# Altium PCB ADC_RS_MCU.PcbDoc
Units mm, origin at the board's own origin, x right, y up, seen from the top; angles counter-clockwise.
Board outline 165 x 40 mm, 4 copper layers (Top Layer, GND, 5V, Bottom Layer), stack 1.369 mm thick; 80 components, 57 nets, 318 pads, 74 vias.
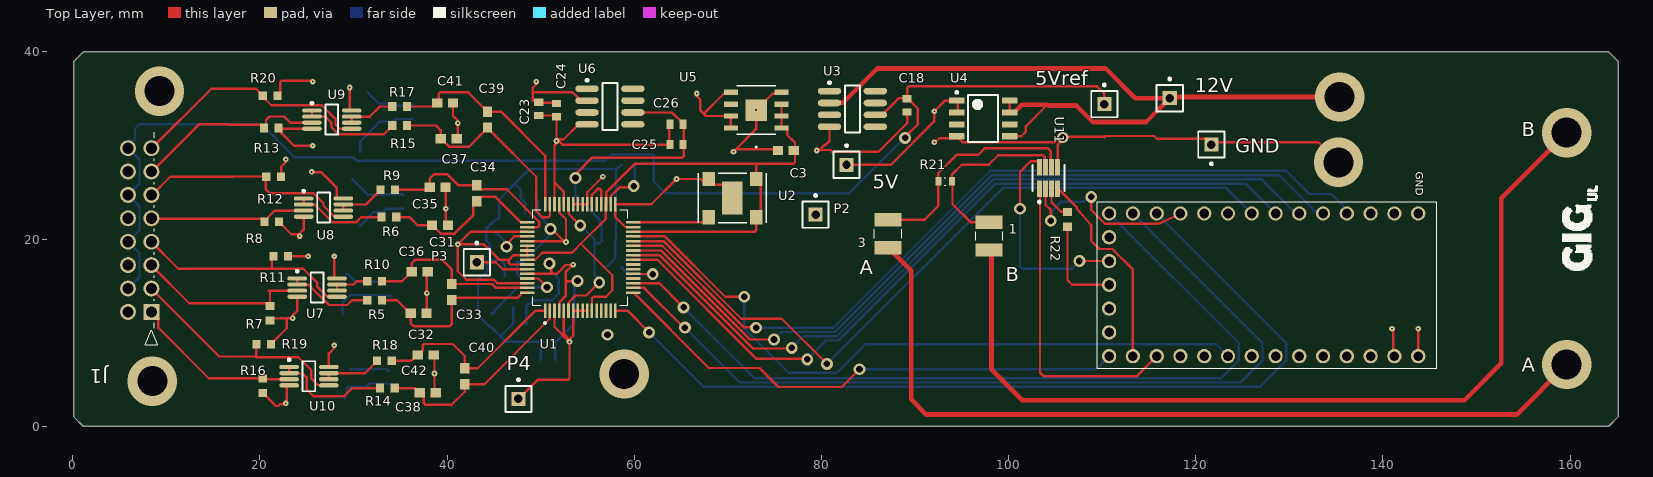
[diagram p0: Top Layer view]
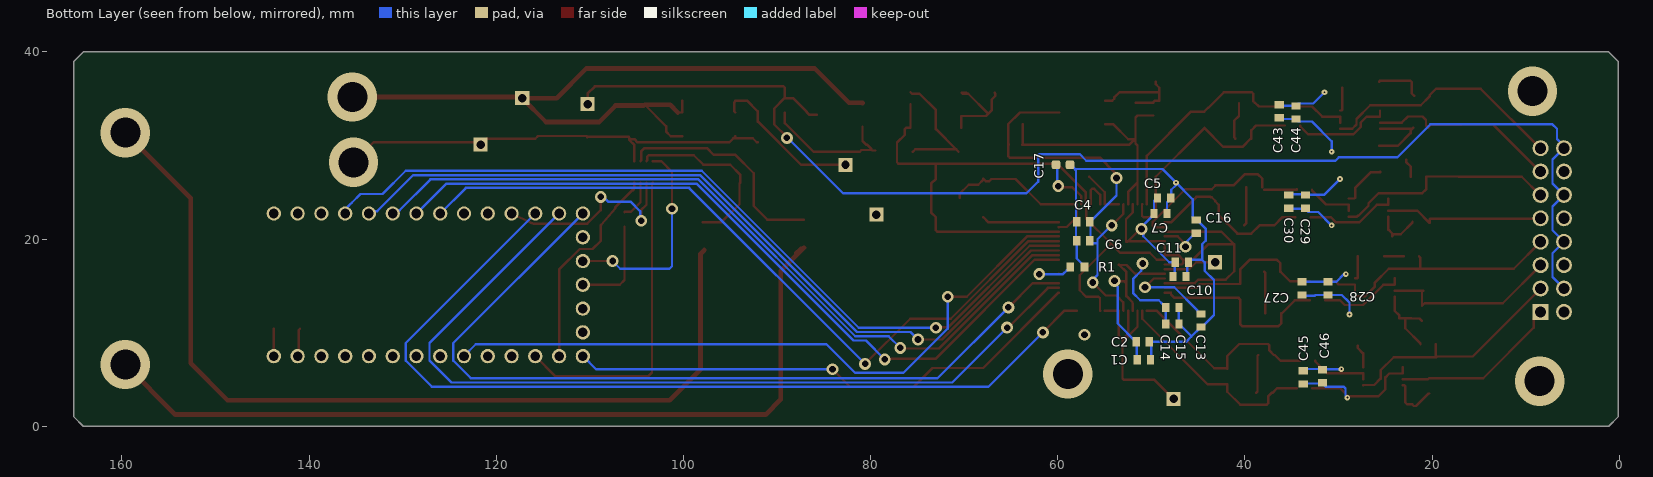
[diagram p1: Bottom Layer view, seen from below]
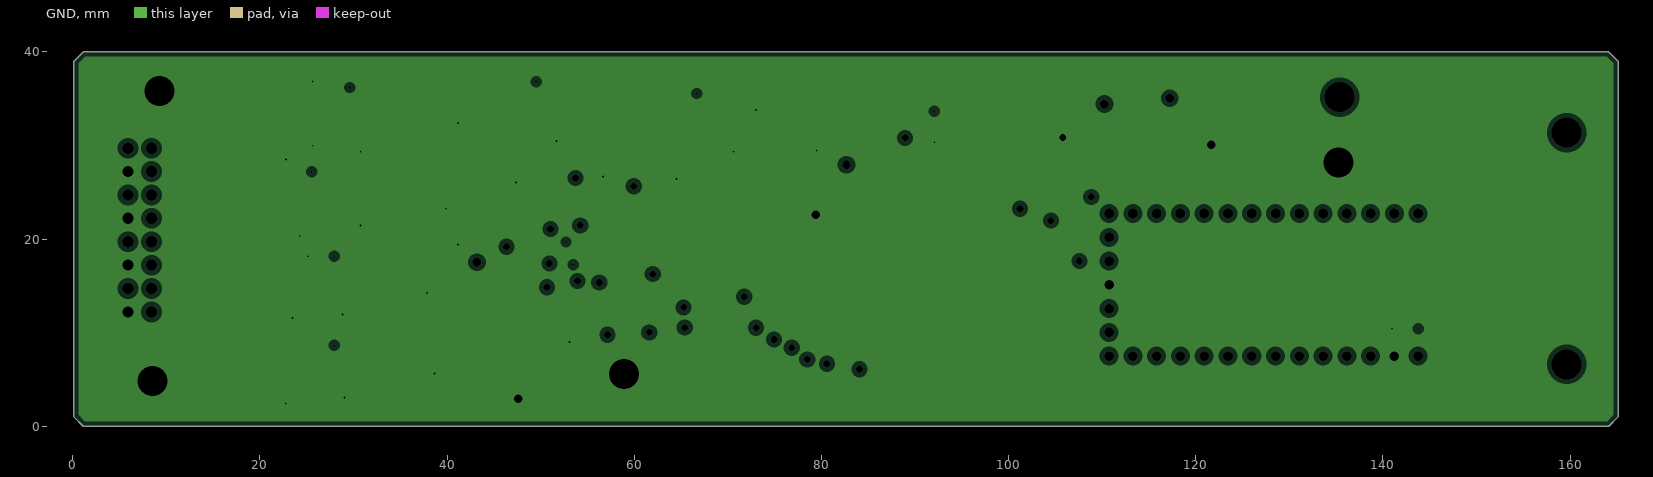
[diagram p2: GND, clearances drawn from the general rule]
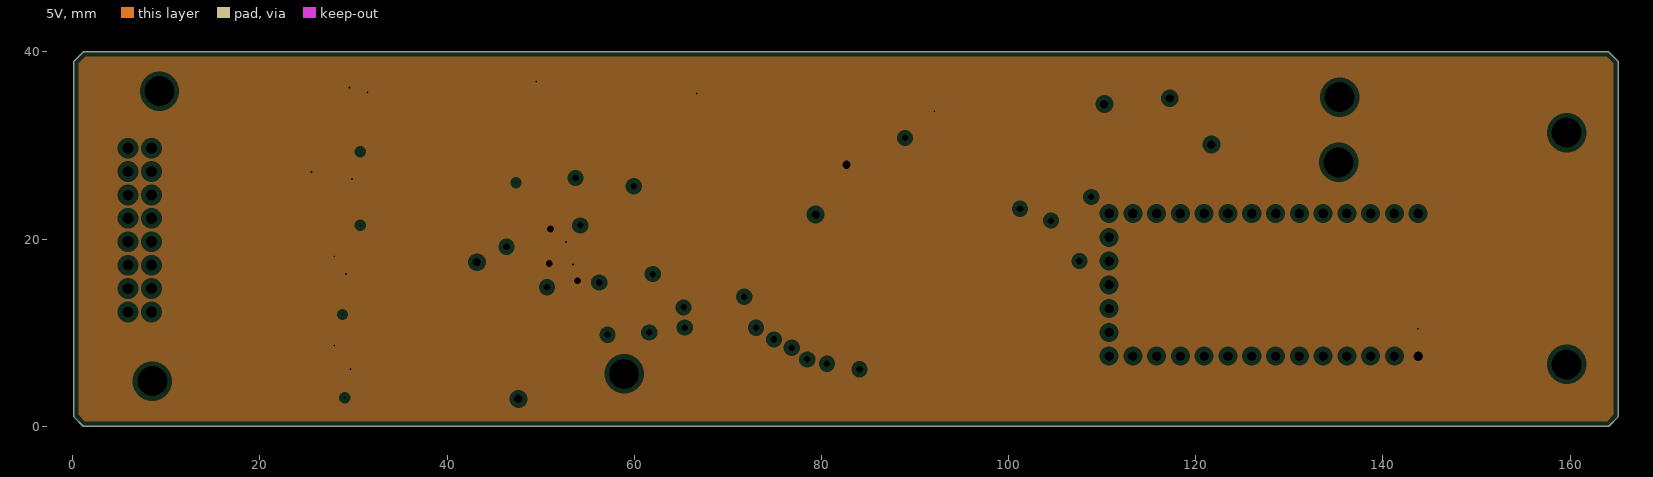
[diagram p3: 5V, clearances drawn from the general rule]
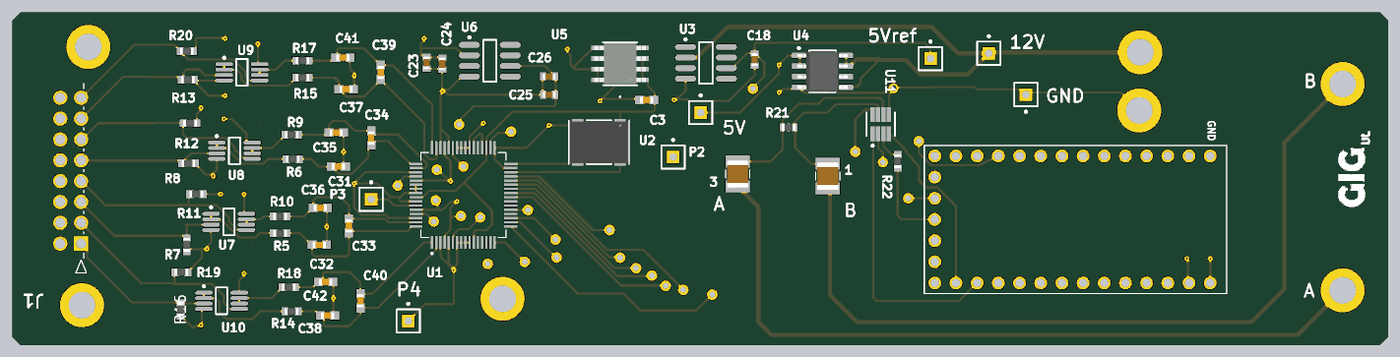
[diagram p4: 3D render of the assembled board from above, using the file's embedded part models]
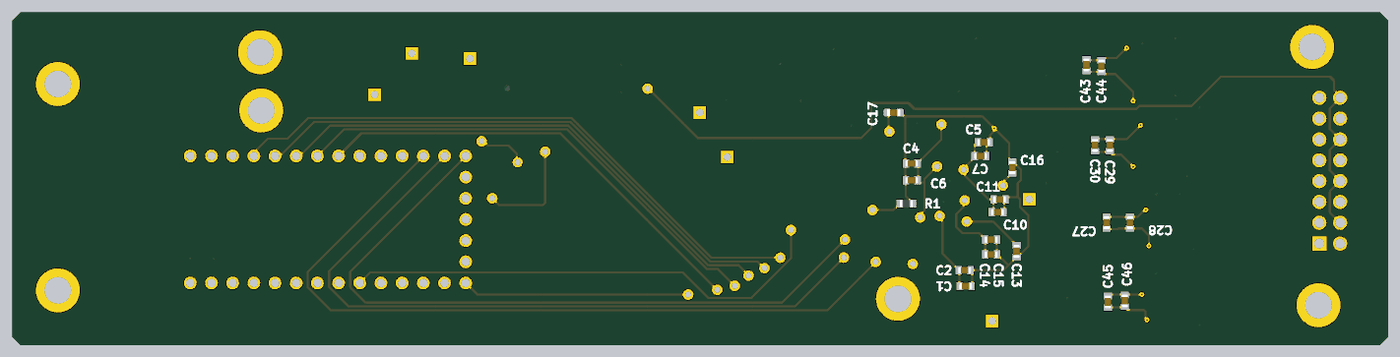
[diagram p5: 3D render of the assembled board from below, using the file's embedded part models]

## Layer stack, top to bottom
Top Solder: solder mask 0.0254, SM-001, Dk 4
Top Layer: signal copper 0.035
Dielectric 1: prepreg 0.1295, PP-017, Dk 4.3
Dielectric 2: prepreg 0.1295, PP-017, Dk 4.3
GND: plane copper 0.035, net GND
Dielectric 3: core 0.7112, Core-039, Dk 4.8
5V: plane copper 0.035, net 5V
Dielectric 4: prepreg 0.1295, PP-017, Dk 4.3
Dielectric 5: prepreg 0.1295, PP-017, Dk 4.3
Bottom Layer: signal copper 0.035
Bottom Solder: solder mask 0.0254, SM-001, Dk 4

## Board outline
0.127,1 0.127,39 1.127,40 164.127,40 165.127,39 165.127,1 164.127,0 1.127,0

## Design rules (kind name [scope] priority, off if disabled: settings)
BoardOutlineClearance [All] p1: gap=1 ignorepadtopadclearanceinfootprint=FALSE
Clearance [All] p1: gap=0.2 ignorepadtopadclearanceinfootprint=TRUE
HoleSize [All] p1: absolutevalues=TRUE maxlimit=5 minlimit=0.2 maxpercent=80.000 minpercent=20.000
HoleToHoleClearance [All] p1: gap=0.4 allowstackedmicrovias=TRUE
MinimumAnnularRing [All] p1: minimumring=0.15
MinimumSolderMaskSliver [All] p1: minsoldermaskwidth=0.1
PlaneClearance [All] p1: clearance=0.508
PlaneConnect [All] p1: planeconnectstyle=Relief reliefexpansion=0.508 reliefentries=4 reliefconductorwidth=0.254 reliefairgap=0.254
PolygonConnect [All] p1: connectstyle=Relief reliefconductorwidth=0.254 reliefentries=4 polygonreliefangle="90 Angle" airgapwidth=0.254
RoutingVias [All] p1: holewidth=0.711 width=1.27 viastyle="Through Hole" minholewidth=0.711 minwidth=1.27 maxholewidth=0.711 maxwidth=1.27
SilkToSolderMaskClearance [IsPad] p1: minsilkscreentomaskgap=0.2 clearancetoexposedcopper=TRUE
SolderMaskExpansion [All] p1: expansion=0.102 istentingtop=FALSE
Width [All] p1: maxlimit=1.254 minlimit=0.254 preferedwidth=0.254 bottomlayer_maxwidth=0.254 minimp=50.000000 maximp=50.000000 favimp=50.000000
24 further rules are at their usual default settings.

## Classes and differential pairs
component class Vref: C3 C18 C23 C24 C25 C26 U3 U4 U5 U6
component class thvd8000: 1 3 R21 R22 U11
component class driver0-3: C27 C28 C29 C30 C31 C32 C33 C34 C35 C36 C37 C38 C39 C40 C41 C42 C43 C44 C45 C46 J1 R5 R6 R7 R8 R9 R10 R11 R12 R13 R14 R15 R16 R17 R18 R19 R20 U7 U8 U9 U10
component class ad7768: 5V 5Vref C1 C2 C4 C5 C6 C7 C10 C11 C13 C14 C15 C16 C17 GND P2 P3 P4 R1 Teensy1 U2

## Components (designator, comment, footprint, x,y, rotation, side; value= is the part's Value field where it differs from the comment)
1 "0.47uF-250V" CAPC3326X280N 97.917,20.32 r270 top
3 "0.47uF-250V" CAPC3326X280N 87.122,20.574 r270 top
5V "Plug" PIN1 82.677,27.94 r0 top
5Vref "Plug" PIN1 110.236,34.417 r0 top
12V "Plug" PIN1 117.221,35.052 r0 top
C1 "1u" CAPC1608X90N 50.927,9.017 r0 bottom
C2 "0.1uF" CAPC1608X90N 50.8,7.112 r180 bottom
C3 "2.2uF" CAPC1608X90 76.2,29.464 r180 top
C4 "0.1uF" CAPC1608X90N 57.277,21.844 r0 bottom
C5 "0.1uF" CAPC1608X90N 48.641,24.384 r180 bottom
C6 "1u" CAPC1608X90N 57.277,19.812 r180 bottom
C7 "1u" CAPC1608X90N 49.022,22.733 r0 bottom
C10 "0.1uF" CAPC1608X90N 46.99,16.002 r180 bottom
C11 "1u" CAPC1608X90N 46.736,17.526 r0 bottom
C13 "1u" CAPC1608X90N 44.704,11.303 r90 bottom
C14 "0.1uF" CAPC1608X90N 47.752,10.922 r180 bottom
C15 "1u" CAPC1608X90N 47.752,12.7 r0 bottom
C16 "1u" CAPC1608X90N 45.212,21.336 r270 bottom
C17 "10uF" CAPC1608X9N 59.436,27.94 r0 bottom
C18 "0.1uF" CAPC1608X90N 89.154,34.29 r270 top
C23 "1u" CAPC1608X90N 49.81,33.909 r90 top
C24 "0.1uF" CAPC1608X90N 51.689,33.782 r270 top
C25 "1u" CAPC1608X90N 64.516,30.099 r0 top
C26 "0.1uF" CAPC1608X90N 64.516,32.258 r180 top
C27 "0.1uF" CAPC1608X90N 33.909,14.732 r270 bottom
C28 "1u" CAPC1608X90N 31.115,14.732 r270 bottom
C29 "0.1uF" CAPC1608X90N 33.528,24.003 r270 bottom
C30 "1u" CAPC1608X90N 35.306,24.003 r270 bottom
C31 "120pF" CAPC1608X90 39.243,21.463 r180 top
C32 "120pF" CAPC1608X90 36.957,12.065 r180 top
C33 "330pF" CAPC1608X90 40.513,14.351 r90 top
C34 "330pF" CAPC1608X90 43.18,24.892 r90 top
C35 "120pF" CAPC1608X90 38.989,25.527 r0 top
C36 "120pF" CAPC1608X90 37.084,16.51 r0 top
C37 "120pF" CAPC1608X90 40.171,30.734 r180 top
C38 "120pF" CAPC1608X90 37.946,3.57 r180 top
C39 "330pF" CAPC1608X90 44.323,32.766 r90 top
C40 "330pF" CAPC1608X90 41.883,5.348 r90 top
C41 "120pF" CAPC1608X90 39.79,34.544 r0 top
C42 "120pF" CAPC1608X90 37.719,7.62 r0 top
C43 "0.1uF" CAPC1608X90N 36.322,33.655 r270 bottom
C44 "1u" CAPC1608X90N 34.544,33.528 r270 bottom
C45 "1u" CAPC1608X90N 33.755,5.221 r270 bottom
C46 "0.1uF" CAPC1608X90N 31.723,5.348 r270 bottom
GND "Plug" PIN1 121.666,30.099 r180 top (schematic designator P7)
J1 "1053141216" CON_1053141216 8.41,12.218 r270 top
P2 "Plug" PIN1 79.375,22.606 r0 top
P3 "Plug" PIN1 43.18,17.526 r0 top
P4 "Plug" PIN1 47.625,2.921 r0 top
R1 "100" RESC1508X55N 57.912,17.018 r180 bottom
R5 "33" RESC1608X55N 32.258,13.462 r0 top
R6 "33" RESC1608X55N 33.782,22.352 r0 top
R7 "1M" RESC1608X55N 21.082,12.065 r90 top
R8 "1M" RESC1608X55N 21.278,21.844 r0 top
R9 "33" RESC1608X55N 33.655,25.273 r0 top
R10 "33" RESC1608X55N 32.258,15.494 r0 top
R11 "1M" RESC1608X55N 22.225,18.161 r180 top
R12 "1M" RESC1608X55N 21.463,26.67 r0 top
R13 "1M" RESC1608X55N 21.209,31.877 r180 top
R14 "33" RESC1608X55N 33.628,4.078 r0 top
R15 "33" RESC1608X55N 34.925,32.131 r0 top
R16 "1M" RESC1608X55N 20.32,4.318 r90 top
R17 "33" RESC1608X55N 34.925,34.163 r0 top
R18 "33" RESC1608X55N 33.305,6.999 r0 top
R19 "1M" RESC1608X55N 20.42,8.777 r180 top
R20 "1M" RESC1608X55N 21.082,35.306 r180 top
R21 "120" RES_ERA3AEB121V 93.218,26.162 r0 top
R22 "1.5k" RESC1608X55N 106.299,22.098 r90 top
Teensy1 "DEV-15583" MODULE_DEV-15583 127.254,15.113 r270 top
U1 "AD7768-4BSTZ" QFP50P1200X1200X160-64N 54.229,18.034 r90 top
U2 "DSC1001AI2-032.7680" DFN4_7X5_MCH 70.485,24.384 r270 top
U3 "ADR435BRZ" ADI-R-8_M 83.312,33.909 r0 top
U4 "REG103UA-5" D0008A_M 97.282,32.893 r0 top
U5 "ADP7118ARDZ-3.3-R7" SOIC_08_EP_3P9X4P9_ADI 73.025,33.782 r180 top
U6 "ADR4540BRZ" ADI-R-8_M 57.404,34.163 r0 top
U7 "ADA4841-2YRMZ-RL" ADI-RM-8_M 26.108,14.821 r0 top
U8 "ADA4841-2YRMZ-RL" ADI-RM-8_M 26.797,23.368 r0 top
U9 "ADA4841-2YRMZ-RL" ADI-RM-8_M 27.686,32.766 r0 top
U10 "ADA4841-2YRMZ-RL" ADI-RM-8_M 25.246,5.348 r0 top
U11 "THVD8000DDFR" DDF0008A-IPC_A 104.267,26.543 r90 top

## Footprints (in the part's own frame and the unit in brackets; to place one, negate y for a bottom-side part, rotate by r counter-clockwise, add the part's x,y. Pads: shape width x height; smd on the part's side, far side on the other; paste and mask are expansions set on the pad)
ADI-R-8_M [mm] "SOIC, 8-Leads, Body 4.9x3.9mm, Pitch 1.27mm, IPC Low Density"
  oval 2.5x0.7 smd: 1(-2.45,1.905) 2(-2.45,0.635) 3(-2.45,-0.635) 4(-2.45,-1.905) 5(2.45,-1.905) 6(2.45,-0.635) 7(2.45,0.635) 8(2.45,1.905)
  silkscreen extent -2.57,-2.5 0.8,2.93, body extent -2,-2.5 2,2.5, height 1.75
ADI-RM-8_M [mm] "SOP, 8-Leads, Body 3x3mm, Pitch 0.65mm, IPC Low Density"
  oval 2.1x0.45 smd: 1(-2.125,0.975) 2(-2.125,0.325) 3(-2.125,-0.325) 4(-2.125,-0.975) 5(2.125,-0.975) 6(2.125,-0.325) 7(2.125,0.325) 8(2.125,0.975)
  silkscreen extent -2.25,-1.6 0.67,1.87, body extent -1.6,-1.6 1.6,1.6, height 1.1
CAPC1608X9N [mm]
  rrect50% 0.93x0.93 smd: 1(-0.75,0) 2(0.75,0)
  body extent -0.8,-0.4 0.8,0.4, height 0.4
CAPC1608X90 [mm]
  rect 1.1x1 smd: 1(-0.85,0) 2(0.85,0)
  body extent -0.8,-0.41 0.8,0.41, height 0.45
CAPC1608X90N [mm]
  rect 0.78x0.99 smd: 1(-0.7,0) 2(0.7,0)
  body extent -0.8,-0.41 0.8,0.41, height 0.9
CAPC3326X280N [mm]
  rect 1.42x2.91 smd: 1(-1.492,0) 2(1.492,0)
  silkscreen extent -0.46,-1.45 0.46,1.45, body extent -1.65,-1.3 1.65,1.3, height 2.8
CON_1053141216 [mm]
  rect 1.7x1.7 hole 1.2 mask+0.076: 1(0,0)
  round 1.7 hole 1.2 mask+0.076: 2(-2.5,0) 3(-5,0) 4(-7.5,0) 5(-10,0) 6(-12.5,0) 7(-15,0) 8(-17.5,0) 9(0,-2.5) 10(-2.5,-2.5) 11(-5,-2.5) 12(-7.5,-2.5) 13(-10,-2.5) 14(-12.5,-2.5) 15(-15,-2.5) 16(-17.5,-2.5)
  silkscreen extent -19.22,-0.63 3.5,0.64, body extent 0,0 0.25,0.25, height 0.25
D0008A_M [mm] "SOIC, 8-Leads, Body 5x4mm, Pitch 1.27mm, IPC Low Density"
  rrect15% 1.65x0.65 smd: 1(-2.825,1.905) 2(-2.825,0.635) 3(-2.825,-0.635) 4(-2.825,-1.905) 5(2.825,-1.905) 6(2.825,-0.635) 7(2.825,0.635) 8(2.825,1.905)
  silkscreen extent -2.95,-2.5 1.6,2.9, body extent -3,-2.45 3,2.45, height 1.63
DDF0008A-IPC_A [mm]
  rect 1.757x0.512 smd paste+0 mask+0: 1(-1.151,0.975) 2(-1.151,0.325) 3(-1.151,-0.325) 4(-1.151,-0.975) 5(1.151,-0.975) 6(1.151,-0.325) 7(1.151,0.325) 8(1.151,0.975)
  silkscreen extent -2.7,-1.7 1.4,1.7, body extent 0,0 0.25,0.25, height 0.25
DFN4_7X5_MCH [mm]
  rect 1.505x1.349 smd paste+0 mask+0: 1(-2.052,2.54) 2(-2.052,-2.54) 3(2.052,-2.54) 4(2.052,2.54)
  rect 3.5x2.2 smd paste+0 mask+0: 5(0,0)
  silkscreen extent -5.52,-3.63 2.63,3.63, body extent -2.5,-3.5 2.5,3.5, height 0.85
MODULE_DEV-15583 [mm]
  round 1.53 hole 1.02: 0(-7.62,13.97) 1(-7.62,11.43) 2(-7.62,8.89) 3(-7.62,6.35) 3.3V_1(-2.54,-16.51) 3.3V_2(7.62,11.43) 4(-7.62,3.81) 5(-7.62,1.27) 6(-7.62,-1.27) 7(-7.62,-3.81) 8(-7.62,-6.35) 9(-7.62,-8.89) 10(-7.62,-11.43) 11(-7.62,-13.97) 12(-7.62,-16.51) 13(7.62,-16.51) 14(7.62,-13.97) 15(7.62,-11.43) 16(7.62,-8.89) 17(7.62,-6.35) 18(7.62,-3.81) 19(7.62,-1.27) 20(7.62,1.27) 21(7.62,3.81) 22(7.62,6.35) 23(7.62,8.89) G1(-7.62,16.51) G3(7.62,13.97) ON-OFF(5.08,-16.51) PGM(2.54,-16.51) VBAT(-5.08,-16.51) VIN(7.62,16.51) ""(0,-16.51)
  silkscreen extent -8.89,-17.78 8.89,18.48
PIN1 [mm]
  rect 1.5x1.5 hole 0.9: 1(0,0)
  silkscreen extent -1.4,-1.4 1.4,2.17
QFP50P1200X1200X160-64N [mm]
  rrect25% 1.56x0.28 smd mask+0.051: 1(-5.68,3.75) 2(-5.68,3.25) 3(-5.68,2.75) 4(-5.68,2.25) 5(-5.68,1.75) 6(-5.68,1.25) 7(-5.68,0.75) 8(-5.68,0.25) 9(-5.68,-0.25) 10(-5.68,-0.75) 11(-5.68,-1.25) 12(-5.68,-1.75) 13(-5.68,-2.25) 14(-5.68,-2.75) 15(-5.68,-3.25) 16(-5.68,-3.75) 33(5.68,-3.75) 34(5.68,-3.25) 35(5.68,-2.75) 36(5.68,-2.25) 37(5.68,-1.75) 38(5.68,-1.25) 39(5.68,-0.75) 40(5.68,-0.25) 41(5.68,0.25) 42(5.68,0.75) 43(5.68,1.25) 44(5.68,1.75) 45(5.68,2.25) 46(5.68,2.75) 47(5.68,3.25) 48(5.68,3.75)
  rrect25% 0.28x1.56 smd mask+0.051: 17(-3.75,-5.68) 18(-3.25,-5.68) 19(-2.75,-5.68) 20(-2.25,-5.68) 21(-1.75,-5.68) 22(-1.25,-5.68) 23(-0.75,-5.68) 24(-0.25,-5.68) 25(0.25,-5.68) 26(0.75,-5.68) 27(1.25,-5.68) 28(1.75,-5.68) 29(2.25,-5.68) 30(2.75,-5.68) 31(3.25,-5.68) 32(3.75,-5.68) 49(3.75,5.68) 50(3.25,5.68) 51(2.75,5.68) 52(2.25,5.68) 53(1.75,5.68) 54(1.25,5.68) 55(0.75,5.68) 56(0.25,5.68) 57(-0.25,5.68) 58(-0.75,5.68) 59(-1.25,5.68) 60(-1.75,5.68) 61(-2.25,5.68) 62(-2.75,5.68) 64(-3.75,5.68) ""(-3.25,5.68)
  silkscreen extent -7.11,-5.1 5.1,5.1
RES_ERA3AEB121V [mm]
  rect 0.65x0.9 smd: 1(-0.725,0) 2(0.725,0)
  silkscreen extent -0.08,-0.4 0.08,0.4, body extent -0.8,-0.4 0.8,0.4, height 0.45
RESC1508X55N [mm]
  rect 0.81x0.98 smd: 1(-0.771,0) 2(0.771,0)
  body extent -0.77,-0.43 0.77,0.43, height 0.55
RESC1608X55N [mm]
  rect 0.87x0.93 smd: 1(-0.78,0) 2(0.78,0)
  body extent -0.8,-0.4 0.8,0.4, height 0.55
SOIC_08_EP_3P9X4P9_ADI [mil]
  rect 59x22 smd paste+0 mask+0: 1(-106.5,75) 2(-106.5,25) 3(-106.5,-25) 4(-106.5,-75) 5(106.5,-75) 6(106.5,-25) 7(106.5,25) 8(106.5,75)
  rect 90x90 smd paste+0 mask+0: EPAD(0,0)
  silkscreen extent -82,-102 82,102, body extent -122,-96 122,96, height 69

## Part data
1 3: library part CMP-010-000002-1, Package=None, Availability=Unavailable, Component Type=Standard, Design Item ID=C1210X474KARACAUTO, MF="{'manufacturer': u'KEMET'}", MP=C1210X474KARACAUTO, Pin Count=2, Price=None, Source=workerBoard.SCHLIB
5V 5Vref GND P2 P3 P4: library part CMP-010-000007-1, Component Type=Standard, Design Item ID=Plug, LatestRevisionDate=17-Jul-2002, LatestRevisionNote="Re-released for DXP Platform.", Pin Count=1, Publisher="Altium Limited", Source=workerBoard.SCHLIB
C1 C6 C7 C11 C13 C15 C16 C23 C25 C28 C30 C44 C45: library part CMP-003-000003-1, "Capacitor", Manufacturer_Name=AVX, Manufacturer_Part_Number=0603YC105MAT4A, Component Type=Standard, Datasheet Link=https://componentsearchengine.com/Datasheets/1/06031A100FAT2A.pdf, Design Item ID=0603YC105MAT4A, Height=0.9mm, Pin Count=2, Source=workerBoard.SCHLIB
C2 C4 C5 C10 C14 C18 C24 C26 C27 C29 C43 C46: library part CMP-003-000001-1, "Cap Ceramic 0.1uF 25V X5R 10% SMD 0603 85ÂÂŽ T/R", Package=None, Availability=Unavailable, Component Type=Standard, Design Item ID=06033D104KAT2A, MF="{'manufacturer': u'AVX'}", MP=06033D104KAT2A, Pin Count=2, Price=None, Source=workerBoard.SCHLIB
C3: library part CMP-003-000006-1, "2.2UF 16V 20%", Package=None, Availability=Unavailable, Component Type=Standard, Design Item ID=F981C225MMA, MF="{'manufacturer': u'AVX'}", MP=F981C225MMA, Pin Count=2, Price=None, Source=workerBoard.SCHLIB
C17: library part CMP-003-000008-1, "CAP CER 10UF 10V X5R 0603", Package=None, Availability=Unavailable, Component Type=Standard, Design Item ID=GRT188R61A106ME13D, MF="{'manufacturer': u'Murata'}", MP=GRT188R61A106ME13D, Pin Count=2, Price=None, Source=workerBoard.SCHLIB
C31 C32 C35 C36 C37 C38 C41 C42: library part CMP-003-000002-1, "0603 120 pF 50 V Â±2 % Tolerance C0G/NP0 SMT Multilayer Ceramic Capacitor", Package=None, Availability=Unavailable, Component Type=Standard, Design Item ID=06035A121GAT2A, MF="{'manufacturer': u'AVX'}", MP=06035A121GAT2A, Pin Count=2, Price=None, Source=workerBoard.SCHLIB
C33 C34 C39 C40: library part CMP-003-000000-1, "0603 SMD Ceramic Capacitors 0603 330pF 25volts C0G 2%", Package=None, Availability=Unavailable, Component Type=Standard, Design Item ID=06033A331GAT2A, MF="{'manufacturer': u'AVX'}", MP=06033A331GAT2A, Pin Count=2, Price=None, Source=workerBoard.SCHLIB
J1: library part CMP-010-000000-1, "No Description Available", Mfr_Name="Molex Connector Corporation", Component Type=Standard, Copyright="Copyright (C) 2021 Ultra Librarian. All rights reserved.", Design Item ID=1053141216, Digi-Key_Part_Number_1=WM15165-ND, Manufacturer_Part_Number=1053141216, Pin Count=16, RefDes=RefDes, Source=workerBoard.SCHLIB, Type=DEV
R1: library part CMP-008-000002-1, Package=None, Availability=Unavailable, Component Type=Standard, Design Item ID=MCT0603MD1000DP500, MF="{'manufacturer': u'Vishay'}", MP=MCT0603MD1000DP500, Pin Count=2, Price=None, Source=workerBoard.SCHLIB
R5 R6 R9 R10 R14 R15 R17 R18: library part CMP-008-000006-1, "RES SMD 33 OHM 0.1% 1/10W 0603", Package=None, Availability=Unavailable, Component Type=Standard, Design Item ID=RT0603BRD0733RL_2, MF="{'manufacturer': u'Yageo'}", MP=RT0603BRD0733RL, Pin Count=2, Price=None, Source=workerBoard.SCHLIB
R7 R8 R11 R12 R13 R16 R19 R20: library part CMP-008-000007-1, Package=None, Availability=Unavailable, Component Type=Standard, Design Item ID=RT0603DRD071ML, MF="{'manufacturer': u'Yageo'}", MP=RT0603DRD071ML, Pin Count=2, Price=None, Source=workerBoard.SCHLIB
R21: library part CMP-008-000000-1, Package=None, Availability=Unavailable, Component Type=Standard, Design Item ID=ERA3AEB121V, MF="{'manufacturer': u'Panasonic'}", MP=ERA3AEB121V, Pin Count=2, Price=None, Source=workerBoard.SCHLIB
R22: library part CMP-008-000003-1, Package=None, Availability=Unavailable, Component Type=Standard, Design Item ID=RT0603BRD071K5L, MF="{'manufacturer': u'Yageo'}", MP=RT0603BRD071K5L, Pin Count=2, Price=None, Source=workerBoard.SCHLIB
Teensy1: library part CMP-010-000005-1, "RT1062 Teensy 4.0 i.MX ARMÂ® CortexÂ®-M7 MPU Embedded Evaluation Board", Package=None, Component Type=Standard, Design Item ID=DEV-15583, Digi-Key_Part_Number=1568-DEV-15583-ND, Digi-Key_Purchase_URL=https://www.digikey.com/product-detail/en/sparkfun-electronics/DEV-15583/1568-DEV-15583-ND/10384551?utm_source=snapeda&utm_medium=aggregator&utm_campaign=symbol, MF="SparkFun Electronics", MP=DEV-15583, Pin Count=33, SnapEDA_Link=https://www.snapeda.com/parts/DEV-15583/SparkFun%20Electronics/view-part/4001229/?ref=snap, Source=workerBoard.SCHLIB
U1: library part CMP-005-000000-1, "24 Bit Analog to Digital Converter 4 Input 4 Sigma-Delta 64-LQFP _10x10_", Package="LQFP -64 Analog Devices", Digi-Key_Part_Number=AD7768-4BSTZ-ND, Digi-Key_Purchase_URL=https://www.digikey.com/product-detail/en/analog-devices-inc/AD7768-4BSTZ/AD7768-4BSTZ-ND/6072260?utm_source=snapeda&utm_medium=aggregator&utm_campaign=symbol, MF="Analog Devices", MP=AD7768-4BSTZ, SnapEDA_Link=https://www.snapeda.com/parts/AD7768-4BSTZ/Analog%20Devices%20Inc./view-part/501603/?ref=snap
U2: library part CMP-010-000006-1, "No Description Available", Mfr_Name=Microchip, Component Type=Standard, Copyright="Copyright (C) 2021 Ultra Librarian. All rights reserved.", Design Item ID=DSC1001AI2-032.7680, Digi-Key_Part_Number_1=DSC1001AI2-032.7680-ND, Manufacturer_Part_Number=DSC1001AI2-032.7680, Pin Count=5, RefDes=RefDes, Source=workerBoard.SCHLIB, Type=DEV
U3: library part CMP-006-000001-1, "Ultralow Noise XFET Voltage Reference with Current Sink and Source Capability, 5 V Output, 7 to 18 V Supply, Industrial, 8-pin SOIC (R-8), Tube", Manufacturer="Analog Devices", Operating Temp Range="-40 to 125 degC", Code_JEDEC=MS-012-AA, Component Type=Standard, ComponentLink1Description="Manufacturer URL", ComponentLink1URL=http://www.analog.com/en/index.html, ComponentLink2Description=Datasheet, ComponentLink2URL=http://www.analog.com/static/imported-files/data_sheets/ADR430_431_433_434_435_439.pdf, ComponentLink3Description="Package Specification", ComponentLink3URL=http://www.analog.com/static/imported-files/packages/PKG_PDF/SOIC_Narrow%20(R)/R_8.pdf, ComponentLink4Description="URL Link1", ComponentLink4URL="Product URL:http://www.analog.com/en/special-linear-functions/voltage-references/adr435/products/product.html", DatasheetVersion="Rev. J", Design Item ID=CMP-0784-00226-1, Manufacturer Part Number=ADR435BRZ, Max V Supply (V)=18, Min V Supply (V)=7, Mounting Technology="Surface Mount", PackageDescription="8-Pin Standard Small Outline Package, Body 4.9 x 3.9 mm, Pitch 1.27 mm", PackageReference=R-8, PackageVersion="060506-A, 06/2006", Packing=Tube, PartNumber=ADR435BRZ, Pin Count=8, Ref Out TC (ppm/C)=1, Source=workerBoard.SCHLIB, Vout=5V
U4: library part CMP-010-000004-1, "Single Output Fast Transient Response LDO, 500 mA, Fixed 5 V Output, 2.1 to 15 V Input, 8-pin SOIC (D), -55 to 125 degC, Green (RoHS & no Sb/Br)", Manufacturer="Texas Instruments", Power Good=TRUE, Accuracy(%)=2, Code_JEDEC=MS-012, Component Type=Standard, ComponentLink1Description="Manufacturer URL", ComponentLink1URL=http://www.ti.com/, ComponentLink2Description=Datasheet, ComponentLink2URL=http://www.ti.com/general/docs/lit/getliterature.tsp?genericPartNumber=REG103-5&fileType=pdf, ComponentLink3Description="Package Specification", ComponentLink3URL=http://www.ti.com/litv/pdf/msoi002j, DatasheetVersion=SBVS010D, Design Item ID=CMP-0395-00135-2, Eco-Plan="Green (RoHS & no Sb/Br)", Fixed Output Options(V)=5, Iout(Max)(A)=0.5, Iq(Typ)(mA)=0.5, Manufacturer Part Number=REG103UA-5, Mounting Technology="Surface Mount", PackageDescription="8-Pin Plastic Small Outline, Body 4.9 x 3.9 mm, Pitch 1.27 mm", PackageReference=D0008A, PackageVersion=4040047-3/M, PartNumber=REG103UA-5, Pin Count=8, Source=workerBoard.SCHLIB, SubFamily="Single Channel LDO", Vdo(Typ)(mV)=160, Vin(Max)(V)=15, Vin(Min)(V)=2.1, Vout Adj(Max)(V)=5, Vout Adj(Min)(V)=5
U5: library part CMP-010-000001-1, "No Description Available", Mfr_Name="Analog Devices Inc", Component Type=Standard, Copyright="Copyright (C) 2021 Ultra Librarian. All rights reserved.", Design Item ID=ADP7118ARDZ-3.3-R7, Manufacturer_Part_Number=ADP7118ARDZ-3.3-R7, Pin Count=9, RefDes=RefDes, Source=workerBoard.SCHLIB, Type=DEV
U6: library part CMP-006-000000-1, "Ultralow Noise, High Accuracy Voltage Reference, 4.096 V Output, 3 to 15 V Supply, Industrial, 8-pin SOIC (R-8), Tube", Manufacturer="Analog Devices", Operating Temp Range="-40 to 125 degC", Code_JEDEC=MS-012-AA, Component Type=Standard, ComponentLink1Description="Manufacturer URL", ComponentLink1URL=http://www.analog.com/en/index.html, ComponentLink2Description=Datasheet, ComponentLink2URL=http://www.analog.com/static/imported-files/data_sheets/ADR4520_4525_4530_4533_4540_4550.pdf, ComponentLink3Description="Package Specification", ComponentLink3URL=http://www.analog.com/static/imported-files/packages/PKG_PDF/SOIC_Narrow%20(R)/R_8.pdf, ComponentLink4Description="URL Link1", ComponentLink4URL="Product URL:http://www.analog.com/en/special-linear-functions/voltage-references/adr4540/products/product.html", DatasheetVersion="Rev. 0", Design Item ID=CMP-0784-00192-1, Manufacturer Part Number=ADR4540BRZ, Max V Supply (V)=15, Min V Supply (V)=3, Mounting Technology="Surface Mount", PackageDescription="8-Pin Standard Small Outline Package, Body 4.9 x 3.9 mm, Pitch 1.27 mm", PackageReference=R-8, PackageVersion="060506-A, 06/2006", Packing=Tube, PartNumber=ADR4540BRZ, Pin Count=8, Ref Out TC (ppm/C)=2, Source=workerBoard.SCHLIB, Vout=4.096V
U7 U8 U9 U10: library part CMP-007-000000-1, "Double Channel Low Wide Band Noise Operational Amplifier, 80 MHz BW, 13 V/us SR, Industrial, 8-pin SOP (RM-8), Reel", Amplifiers Per Package=2, Generic Part Number=ADA4841-2, Input Bias Current=3uA, Input Offset Voltage=40uV, Manufacturer="Analog Devices", Code_JEDEC=MO-187-AA, Component Type=Standard, ComponentLink1Description="Manufacturer URL", ComponentLink1URL=http://www.analog.com/en/index.html, ComponentLink2Description=Datasheet, ComponentLink2URL=http://www.analog.com/static/imported-files/data_sheets/ADA4841-1_4841-2.pdf, ComponentLink3Description="Package Specification", ComponentLink3URL=http://www.analog.com/static/imported-files/packages/PKG_PDF/MSOP%28RM%29/RM_8.pdf, DatasheetVersion="Rev. E", Design Item ID=CMP-0384-01677-1, Iq/Amp=1.5mA, Manufacturer Part Number=ADA4841-2YRMZ-RL, Mounting Technology="Surface Mount", PackageDescription="8-Pin Mini Small Outline Package, Body 3 x 3 mm, Pitch 0.65 mm", PackageReference=RM-8, PartNumber=ADA4841-2YRMZ-RL, Pin Count=8, Slew Rate=13V/us, Small Signal Bandwidth=80MHz, Source=workerBoard.SCHLIB, V Span Max=12V, V Span Min=2.7V
U11: library part CMP-010-000008-1, "No Description Available", Mfr_Name="Texas Instruments", Component Type=Standard, Copyright="Copyright (C) 2021 Ultra Librarian. All rights reserved.", Design Item ID=THVD8000DDFR, Manufacturer_Part_Number=THVD8000DDFR, Pin Count=8, RefDes=RefDes, Source=workerBoard.SCHLIB, Type=DEV
12V: LatestRevisionDate=17-Jul-2002, LatestRevisionNote="Re-released for DXP Platform.", Publisher="Altium Limited"

## Via types
v1: diameter 1.27, hole 0.711, Top Layer to Bottom Layer, 25 vias
v2: diameter 0.6, hole 0.2, Top Layer to GND, 21 vias
v3: diameter 0.6, hole 0.2, Top Layer to 5V, 10 vias
v4: diameter 5.27, hole 3.2, Top Layer to Bottom Layer, 7 vias
v5: diameter 0.6, hole 0.2, GND to Bottom Layer, 5 vias
v6: diameter 0.6, hole 0.2, 5V to Bottom Layer, 4 vias
v7: diameter 1.21, hole 0.711, Top Layer to Bottom Layer, 1 vias
v8: diameter 1.21, hole 0.711, Top Layer to GND, 1 vias

## Nets (pads, with @x,y where several pads share a name; then routed paths per layer and width w, separated by ;. In a path a pad name is that pad's centre, name@x,y a point inside that pad or via, vN(x,y) a via of type N, cw(c..) or ccw(c..) an arc to the next point about the centre after c; other vN are vias at no path point)
3.3MCU: Teensy1.3.3V_1 U11.8 | length 22.6
  Top Layer w0.254: v1(101.219,23.241) 101.219,27.178 102.37,28.329 U11.8@103.292,28.329 ; v1(107.569,17.653) Teensy1.3.3V_1
  Bottom Layer w0.254: v1(101.219,23.241) 101.219,17.102 101.495,16.826 106.742,16.826 v1(107.569,17.653)
5V: 5V.1 C1.2 C2.1 C5.1 C7.2 C10.1 C11.2 C14.1 C15.2 C23.2 C24.1 C27.1 C28.1 C29.1 C30.1 C43.1 C44.1 C45.1 C46.1 Teensy1.VIN U1.4 U1.45 U1.53 U1.60 U4.1 U4.2 U5.5 U5.7 U5.8 U6.2 U7.8 U8.8 U9.8 U10.8 | length 129.6
  Top Layer w0.254: v3(25.527,27.178) 25.548,27.157 26.543,27.157 28.224,25.476 28.224,24.434 28.315,24.343 U8.8 ; U10.8 27.371,7.792 27.94,8.361 v3(27.94,8.636) ; v3(27.94,18.161) 27.94,15.886 28.031,15.796 U7.8 ; v3(29.591,36.195) 29.591,33.832 29.682,33.741 U9.8 ; U1.60 51.308,16.284 ; U1.53 52.512,19.784 52.611,19.685 v3(52.705,19.685) ; v3(49.53,36.83) 49.53,36.555 49.149,36.174 49.149,35.687 ; C23.2@49.81,34.557 C24.1@51.689,34.557 ; C23.2 49.621,34.798 49.149,34.798 49.149,35.687 ; v1(50.927,17.399) 51.121,17.205 51.121,16.471 51.308,16.284 ; v1(51.054,21.082) 51.181,21.082 52.512,19.751 52.573,19.751 v3@52.606,19.784 ; U1.4 51.992,12.367 51.992,13.087 52.012,13.107 52.012,13.249 52.667,13.904 52.667,15.24 ; U1.45 51.992,23.701 51.992,22.839 52.705,22.126 v3@52.705,19.784 ; v3(53.467,17.272) v3@53.423,17.228 ; v1(53.93,15.539) 53.877,15.486 52.914,15.486 52.667,15.24 ; U6.2 54.175,34.798 53.969,35.004 53.969,35.138 53.77,35.337 53.751,35.337 53.401,35.687 49.149,35.687 ; v3@66.739,35.623 v3(66.675,35.56) 66.675,35.285 67.064,34.896 67.064,33.735 67.437,33.362 ; U5.5@69.787,35.623 70.256,35.623 70.168,35.535 69.56,35.535 67.437,33.412 67.437,33.362 ; U5.8 U5.7 67.652,33.147 67.437,33.362 ; 5V.1 87.43,27.94 92.038,32.549 92.038,33.618 v3(92.075,33.655) 93.218,34.798 U4.1 94.457,34.727 94.584,34.6 94.584,33.655 U4.2 ; Teensy1.VIN v3(143.764,10.414) ; 51.308,16.284 51.717,16.284 52.661,17.228 v3@53.423,17.228 ; 52.667,15.24 52.667,16.472 v3@53.423,17.228
  Bottom Layer w0.254: v6(29.21,16.256) 29.415,16.256 30.239,15.432 C28.1 33.834,15.432 C27.1@33.909,15.507 ; v6(29.691,6.11) 31.71,6.11 31.723,6.123 33.553,6.123 C45.1 ; v6(29.845,26.416) 31.503,24.758 33.508,24.758 33.528,24.778 35.231,24.778 C30.1 ; v6(31.496,35.687) 32.692,34.491 34.281,34.491 C44.1 36.12,34.228 C43.1@36.322,34.43 ; C11.2 C11.2@47.498,17.526 ; C10.1@47.765,16.002 47.498,16.269 C11.2@47.498,17.526 ; C14.1@48.527,10.922 48.452,10.997 C15.2 48.452,12.805 48.715,13.068 48.82,13.068 49.214,13.462 51.181,13.462 51.943,14.224 51.943,15.748 51.074,16.617 51.074,17.252 v1(50.927,17.399) ; C5.1@49.416,24.384 49.722,24.078 C7.2 49.722,22.628 51.054,21.296 v1(51.054,21.082) 50.86,20.888 50.86,20.306 48.08,17.526 C11.2@47.498,17.526 ; C2.1@51.575,7.112 51.575,8.965 C1.2 53.594,10.984 53.594,14.929 53.93,15.264 v1(53.93,15.539)
"5V ref": 5Vref.1 C18.1 J1.10 J1.12 J1.14 J1.16 U3.6 | length 143.8
  Top Layer w0.254: U3.6 86.541,33.274 86.837,33.57 86.837,33.624 88.278,35.065 C18.1@89.154,35.065 ; v1(88.945,30.816) 88.945,30.906 90.297,32.258 90.297,33.952 89.184,35.065 C18.1@89.154,35.065 ; 5Vref.1 110.236,35.548 109.462,36.322 89.303,36.322 89.154,36.173 C18.1@89.154,35.065
  Bottom Layer w0.254: J1.10 7.141,15.949 7.141,18.487 J1.12 7.141,20.949 7.141,23.487 J1.14 7.141,25.949 7.141,28.487 J1.16 5.91,29.958 6.66,30.709 6.66,31.784 7.134,32.258 20.193,32.258 23.719,28.732 29.979,28.732 30.336,28.375 56.95,28.375 57.658,29.083 61.954,29.083 62.103,28.934 62.103,26.127 63.338,24.892 82.931,24.892 88.855,30.816 v1(88.945,30.816)
12V: 12V.1 U3.2 U4.5 U4.7 U4.8 | length 83.7
  Top Layer w0.254: U4.5 101.346,30.988 101.854,31.496 101.854,32.062 104.14,34.348 104.223,34.265 ; U4.8 100.107,34.219 U4.7 U4.7@100.607,33.528 ; 12V.1 12V.1@117.348,35.179
  Top Layer w0.5: U3.2 80.873,34.555 82.307,34.555 85.979,38.227 110.363,38.227 113.538,35.052 12V.1 114.681,32.512 109.012,32.512 107.259,34.265 104.223,34.265 ; U4.7@100.607,33.528 101.427,34.348 104.14,34.348 ; 12V.1@117.348,35.179 v4(135.382,35.179)
A: 3.2 | length 91.4
  Top Layer w0.254: 3.2 87.481,19.082 3.2@88.064,18.499
  Top Layer w0.5: 3.2 89.588,16.616 89.588,2.868 91.206,1.25 154.285,1.25 v4(159.639,6.604)
AIN0+: C32.2 C33.1 R5.2 U1.64 | length 20.4
  Top Layer w0.254: R5.2@33.078,13.462 34.66,13.462 36.057,12.065 C32.2 36.107,11.01 36.449,10.668 40.259,10.668 40.513,10.922 40.513,13.551 40.678,13.716 47.539,13.716 47.896,14.073 47.896,14.271 47.909,14.284 U1.64
AIN0-: C33.2 C36.1 R10.2 U1. | length 19.1
  Top Layer w0.254: R10.2@33.078,15.494 35.168,15.494 36.184,16.51 C36.1 36.234,17.438 36.576,17.78 39.497,17.78 40.513,16.764 C33.2 44.818,15.201 45.235,14.784 U1.
AIN1+: C38.2 C40.1 R14.2 U1.2 | length 22.8
  Top Layer w0.254: R14.2@34.448,4.078 36.538,4.078 37.046,3.57 C38.2 37.146,3.57 37.519,3.197 37.519,2.448 37.668,2.3 40.486,2.3 41.883,3.697 C40.1 43.985,4.498 50.966,11.479 50.966,12.341 U1.2
AIN1-: C40.2 C42.1 R18.2 U1.1 | length 21.9
  Top Layer w0.254: R18.2@34.125,6.999 36.198,6.999 36.819,7.62 36.919,7.62 37.392,8.093 37.392,8.636 37.541,8.785 40.605,8.785 41.883,7.507 C40.2@41.883,6.148 ; C40.2 43.283,6.198 49.439,12.354 U1.1
AIN2+: C31.2 C34.1 R6.2 U1.49 | length 18
  Top Layer w0.254: R6.2@34.602,22.352 35.975,22.352 36.864,21.463 C31.2 ; C31.2@38.443,21.463 39.324,20.582 40.801,20.582 42.807,22.588 42.807,23.669 C34.1 43.18,24.092 43.553,24.465 43.656,24.465 43.702,24.511 45.182,24.511 47.909,21.784 U1.49
AIN2-: C34.2 C35.1 R9.2 U1.50 | length 20.3
  Top Layer w0.254: R9.2@34.475,25.343 34.475,25.273 C35.1@37.935,25.273 ; C35.1 38.139,26.455 38.6,26.916 40.039,26.916 41.213,25.742 C34.2 43.18,25.692 43.553,25.319 46.376,25.319 49.859,21.836 49.859,21.433 49.71,21.284 U1.50
AIN3+: C37.2 C39.1 R15.2 U1.47 | length 25
  Top Layer w0.254: R15.2@35.745,32.131 38.805,32.131 39.321,31.615 C37.2 39.371,30.734 40.252,29.853 42.31,29.853 C39.1@44.323,31.866 ; C39.1 C39.1@44.323,31.866 ; U1.47 50.992,23.701 50.992,22.479 50.843,22.33 50.187,22.33 49.53,22.987 49.53,26.659 44.696,31.493 C39.1@44.323,31.866
AIN3-: C39.2 C41.1 R17.2 U1.48 | length 23.9
  Top Layer w0.254: R17.2@35.745,34.163 38.509,34.163 38.89,34.544 C41.1 39.116,34.72 39.116,35.538 39.265,35.687 42.252,35.687 43.9,34.039 43.95,34.039 44.323,33.666 C39.2 45.759,33.616 50.479,28.896 U1.48
B: 1.2 | length 97.9
  Top Layer w0.5: 1.2@97.79,18.828 98.171,18.447 98.171,6.096 101.473,2.794 148.717,2.794 152.654,6.731 152.654,24.384 v4(159.639,31.369)
CS: Teensy1.10 U1.16 | length 97.7
  Top Layer w0.254: U1.16 59.274,12.354 v1(61.595,10.033)
  Bottom Layer w0.254: v1(61.595,10.033) 67.402,4.226 126.878,4.226 129.67,7.018 129.67,8.887 Teensy1.10
DCLK: Teensy1.6 U1.28 | length 80.4
  Top Layer w0.254: U1.28 63.14,19.784 71.433,11.491 75.765,11.491 v1(80.585,6.671)
  Bottom Layer w0.254: v1(80.585,6.671) 99.387,25.473 123.244,25.473 Teensy1.6
DOUT0: Teensy1.2 U1.27 | length 88.9
  Top Layer w0.254: U1.27 62.998,19.284 71.687,10.595 72.959,10.595 v1(73.025,10.529)
  Bottom Layer w0.254: v1(73.025,10.529) 81.268,10.529 98.044,27.305 129.667,27.305 132.152,24.82 132.575,24.82 134.488,24.82 135.431,23.877 cw(c134.339,22.402) Teensy1.2
DOUT1: Teensy1.3 U1.26 | length 86.6
  Top Layer w0.254: U1.26 62.856,18.784 72.369,9.271 v1(74.93,9.271)
  Bottom Layer w0.254: v1(74.93,9.271) 75.734,10.075 81.456,10.075 98.216,26.835 128.867,26.835 132.73,22.972 133.365,22.972 Teensy1.3
DOUT2: Teensy1.4 U1.25 | length 84.3
  Top Layer w0.254: U1.25 62.714,18.284 72.689,8.309 76.762,8.309 v1(76.835,8.382)
  Bottom Layer w0.254: v1(76.835,8.382) 78.074,9.621 81.644,9.621 98.404,26.381 127.035,26.381 130.317,23.099 130.353,23.099 130.719,22.733 Teensy1.4
DOUT3: Teensy1.5 U1.24 | length 82.1
  Top Layer w0.254: U1.24 62.48,17.784 73.07,7.194 78.441,7.194 v1(78.486,7.149)
  Bottom Layer w0.254: v1(78.486,7.149) 80.505,9.167 81.833,9.167 98.592,25.927 125.33,25.927 Teensy1.5
DRDY: Teensy1.18 U1.29 | length 73.4
  Top Layer w0.254: U1.29 63.282,20.284 69.723,13.843 v1(71.755,13.843)
  Bottom Layer w0.254: v1(71.755,13.843) 71.755,10.439 76.485,5.709 81.655,5.709 84.709,8.763 110.594,8.763 110.602,8.755 110.706,8.755 122.182,8.755 Teensy1.18
GND: C1.1 C2.2 C3.2 C4.2 C5.2 C6.1 C7.1 C10.2 C11.1 C13.1 C14.2 C15.1 C16.1 C17.1 C18.2 C23.1 C24.2 C25.1 C26.2 C27.2 C28.2 C29.2 C30.2 C31.1 C32.1 C35.2 C36.2 C37.1 C38.1 C41.2 C42.2 C43.2 C44.2 C45.2 C46.2 GND.1 J1.9 J1.11 J1.13 J1.15 P2.1 P4.1 R1.2 R7.1 R8.2 R11.1 R12.2 R13.1 R16.1 R19.1 R20.1 R22.1 Teensy1. Teensy1.G3 U1.3 U1.5 U1.7 U1.8 U1.9 U1.10 U1.31 U1.33 U1.39 U1.40 U1.41 U1.42 U1.44 U1.46 U1.51 U1.54 U1.55 U1.56 U1.58 U1.62 U2.2 U2.5 U3.4 U4.4 U5.4 U5.EPAD U6.4 U7.4 U8.4 U9.4 U10.4 U11.5 | length 339
  Top Layer w0.254: R16.1@20.32,3.498 20.39,3.498 21.717,2.171 21.962,2.171 22.137,2.346 22.666,2.346 22.86,2.54 22.86,4.282 22.951,4.373 U10.4 ; R7.1@21.082,11.245 21.35,11.513 22.201,11.513 22.245,11.557 22.86,11.557 ; R19.1@21.24,8.777 21.24,8.847 22.86,10.467 22.86,11.557 ; R20.1@21.902,35.306 22.17,35.574 22.17,36.753 22.319,36.902 25.582,36.902 v2(25.654,36.83) ; R13.1@22.029,31.877 22.297,31.609 22.297,31.327 23.652,29.972 v2(25.654,29.972) ; R8.2@22.098,21.844 22.098,21.774 23.358,20.514 24.063,20.514 v2(24.257,20.32) 24.257,20.595 24.672,21.01 U8.4 ; R13.1@22.115,31.791 U9.4 ; R12.2@22.283,26.67 22.283,27.739 22.78,28.236 v2(22.78,28.511) ; R11.1@23.045,18.161 v2(25.146,18.161) ; U7.4 23.983,12.32 23.495,11.832 v2(23.495,11.557) 22.86,11.557 ; C32.1 37.846,12.104 v2(37.846,14.224) 37.846,16.422 C36.2 ; C42.2 38.66,7.529 v2(38.66,5.633) 38.66,3.706 C38.1 ; C35.2 39.878,25.488 v2(39.878,23.241) 39.878,21.678 C31.1 ; C41.2 40.64,33.168 41.148,32.66 v2(41.148,32.385) 41.148,30.861 C37.1 ; P4.1 49.657,4.953 52.937,4.953 53.086,5.102 v2(53.086,9.017) ; U1.54@48.536,19.271 U1.54 U1.55 U1.56 47.113,18.284 46.609,17.78 ; U1.62 48.536,15.297 45.364,15.297 45.006,15.655 42.059,15.655 41.148,16.566 v2(41.148,19.431) ; U1.58 46.758,17.284 46.609,17.433 46.609,17.78 ; U1.51 42.501,20.784 v2(41.148,19.431) ; C23.1 51.487,33.209 51.689,33.007 v2(51.689,30.48) ; U1.3 51.479,10.624 v2(53.086,9.017) ; U1.46 51.479,26.035 ; U1.5 52.479,9.847 v2@53.086,9.24 ; U1.44@52.492,23.727 U1.44 52.479,25.035 51.479,26.035 ; U1.42 U1.41 U1.40 U1.39 54.979,25.007 v2(56.642,26.67) ; U6.4 54.054,32.258 52.47,30.674 51.883,30.674 v2(51.689,30.48) ; U1.10 U1.9 U1.8 U1.7 53.479,9.685 53.086,9.292 v2@53.086,9.24 ; U1.31 59.896,21.297 59.034,21.297 57.979,22.352 U1.33 61.814,23.714 v2(64.516,26.416) 67.076,26.416 67.32,26.173 67.681,26.173 U2.2 67.945,26.359 68.493,25.811 69.512,25.811 70.485,24.838 U2.5 ; C26.2@63.741,32.258 C25.1@63.741,30.099 ; C25.1 C25.1@63.741,30.099 ; v2(70.612,29.337) 70.866,29.591 ; C3.2@75.477,29.337 75.223,29.591 70.866,29.591 ; U5.4 75.578,35.535 74.778,35.535 v2(73.025,33.782) 73.025,31.75 70.866,29.591 ; P2.1 P2.1@79.893,22.088 ; v2(79.502,29.464) 79.844,29.464 ; U3.4 80.862,30.482 80.45,30.07 80.332,30.07 79.903,29.641 79.903,29.524 80.966,29.524 81.153,29.337 86.106,29.337 89.154,32.385 C18.2@89.154,33.515 ; v2(92.075,30.353) 92.169,30.353 92.598,30.782 U4.4@94.663,30.782 ; U4.4 U4.4@94.663,30.782 ; U11.5@105.242,28.329 105.242,30.053 v8@105.791,30.602 ; R22.1 106.299,15.621 106.807,15.113 Teensy1. ; 110.294,30.872 110.236,30.93 ; v4(135.255,28.194) 133.084,30.365 121.932,30.365 GND.1 121.043,30.722 115.834,30.722 115.535,31.021 110.327,31.021 110.236,30.93 ; v2(140.97,10.414) 141.097,10.287 141.097,7.62 Teensy1.G3 ; v2(41.148,19.431) 43.942,19.431 45.593,17.78 46.609,17.78 ; 51.479,26.035 51.479,29.995 51.689,30.205 v2(51.689,30.48) ; v2(51.689,30.48) 51.964,30.48 52.345,30.099 C25.1@63.741,30.099 ; v2(53.086,9.017) v2@53.086,9.24 ; U4.4@94.663,30.782 95.109,30.336 104.898,30.336 105.24,30.678 105.715,30.678 v8@105.791,30.602 ; v8@105.791,30.602 v8(105.791,30.861) 105.86,30.93 110.236,30.93
  Bottom Layer w0.254: v5(28.829,11.938) 28.829,13.208 29.653,14.032 C28.2 32.477,14.032 32.552,13.957 C27.2@33.909,13.957 ; v5(29.056,3.062) 29.25,3.256 29.25,4.018 29.472,4.24 31.39,4.24 31.723,4.573 33.703,4.573 C45.2 ; v5(30.734,21.463) 32.166,22.895 33.195,22.895 33.528,23.228 35.231,23.228 C30.2 ; v5(30.734,29.337) 30.734,30.459 32.84,32.565 34.281,32.565 C44.2 36.27,32.828 C43.2@36.322,32.88 ; C10.2@46.215,16.002 46.172,16.045 46.172,17.263 45.972,17.462 C11.1 45.782,17.78 44.565,17.78 ; C15.1 47.052,10.997 46.977,10.922 46.977,10.892 45.751,9.666 45.751,9.556 ; C7.1 48.322,23.898 47.866,24.354 47.866,25.265 47.371,25.76 v5(47.371,26.035) ; C2.2@50.025,7.112 50.025,8.815 C1.1 46.29,9.017 45.751,9.556 ; R1.2 57.141,17.103 57.977,17.939 C6.1 58.052,19.887 58.052,27.306 58.157,27.411 ; C17.1 58.629,27.94 58.175,27.486 48.822,27.486 v5(47.371,26.035) ; 44.565,17.78 44.565,19.462 44.196,19.831 44.196,21.125 45.107,22.036 45.317,22.036 45.58,22.299 45.58,24.244 v5(47.371,26.035) ; 44.565,17.78 44.311,17.526 44.311,16.618 43.307,15.614 43.307,11.895 44.599,10.603 C13.1 45.751,9.556
  other v2: 22.763,2.443
  other v4: 8.509,4.826 58.928,5.588 9.271,35.814
IN0+: J1.3 R7.2 U7.3 | length 19.2
  Top Layer w0.254: J1.3 8.41,17.192 12.449,13.153 20.814,13.153 21.082,12.885 21.082,14.367 20.954,14.496 U7.3
IN0-: J1.4 R11.2 U7.5 | length 23.9
  Top Layer w0.254: J1.4 8.41,19.692 11.28,16.822 21.278,16.822 ; R11.2@21.405,18.161 21.278,18.034 21.278,16.822 ; U7.5 28.195,13.883 27.163,13.883 26.111,14.935 26.111,15.349 24.638,16.822 21.278,16.822
IN1+: J1.1 R16.2 U10.3 | length 18.2
  Top Layer w0.254: J1.1 9.133,11.495 9.133,10.545 14.54,5.138 20.32,5.138 20.435,5.023 U10.3
IN1-: J1.2 R19.2 U10.5 | length 25.2
  Top Layer w0.254: J1.2 8.41,14.692 15.653,7.449 19.6,7.449 ; R19.2@19.6,8.777 19.6,7.449 ; U10.5 27.333,4.41 26.183,4.41 25.5,5.094 25.5,5.983 24.103,7.38 19.531,7.38 19.6,7.449
IN2+: J1.5 R8.1 U8.3 | length 17.2
  Top Layer w0.254: J1.5 8.446,22.182 20.19,22.182 20.261,22.111 20.261,21.717 21.587,23.043 U8.3
IN2-: J1.6 R12.1 U8.5 | length 24
  Top Layer w0.254: J1.6 8.462,24.718 10.414,26.67 17.145,26.67 17.157,26.682 20.631,26.682 R12.1@20.643,26.67 ; R12.1@20.643,26.6 20.643,25.315 21.063,24.895 25.726,24.895 26.797,23.824 26.797,23.562 27.868,22.491 27.946,22.491 28.044,22.393 U8.5
IN3+: J1.7 R13.2 U9.3 | length 20.6
  Top Layer w0.254: J1.7 8.462,27.218 13.502,32.258 16.79,32.258 16.833,32.215 20.121,32.215 20.389,31.947 20.389,31.877 20.657,32.145 20.657,32.722 21.039,33.104 22.582,33.104 23.245,32.441 U9.3
IN3-: J1.8 R20.2 U9.5 | length 26.2
  Top Layer w0.254: J1.8 8.462,29.718 14.812,36.068 19.57,36.068 R20.2@20.262,35.376 ; R20.2@20.262,35.306 20.262,35.236 21.205,34.293 26.615,34.293 28.084,32.824 28.084,32.236 28.529,31.791 U9.5
MODE: Teensy1.9 U11.2 | length 22
  Top Layer w0.254: U11.2@103.942,26.027 103.942,23.675 104.521,23.096 v7(104.521,21.971) ; v1(108.839,24.511) 108.839,23.094 110.292,21.641 115.824,21.641 ccw(c115.824,22.733) 116.293,21.747 Teensy1.9
  Bottom Layer w0.254: v7(104.521,21.971) 104.618,22.068 104.618,22.957 105.664,24.003 108.056,24.003 108.564,24.511 v1(108.839,24.511)
Net1_1: 1.1 R21.2 U11.7 | length 19.2
  Top Layer w0.254: 1.1 95.917,21.812 94.012,23.717 94.012,25.968 93.943,26.037 93.943,26.887 94.996,27.94 97.871,27.94 98.887,28.956 103.726,28.956 103.875,28.807 103.875,28.396 U11.7@103.942,28.329
Net3_1: 3.1 R21.1 U11.6 | length 23.8
  Top Layer w0.254: 3.1 91.027,22.066 92.493,23.532 R21.1 92.493,27.038 94.448,28.993 96.757,28.993 97.482,29.718 104.15,29.718 104.525,29.343 104.525,28.396 U11.6@104.592,28.329
Net*1_17: 
NetC13_2: C13.2 U1.61 | length 9.7
  Top Layer w0.254: U1.61 49.748,15.784 v1(50.673,14.859)
  Bottom Layer w0.254: C13.2 44.809,12.003 45.072,12.266 45.072,12.371 47.56,14.859 v1(50.673,14.859)
NetC16_2: C16.2 U1.52 | length 4.8
  Top Layer w0.254: v1(46.355,19.177) 46.355,19.452 47.187,20.284 U1.52
  Bottom Layer w0.254: C16.2 45.317,20.636 46.161,19.792 46.161,19.371 v1(46.355,19.177)
NetC17_2: C17.2 U1.34 | length 6.2
  Top Layer w0.254: U1.34 57.492,23.727 57.492,24.589 58.43,25.527 59.817,25.527 v1(59.944,25.654)
  Bottom Layer w0.254: v1(59.944,25.654) 60.065,25.775 60.065,27.819 C17.2
NetR1_1: R1.1 U1.21 | length 5.7
  Top Layer w0.254: U1.21 59.922,16.271 61.961,16.271 v1(61.976,16.256)
  Bottom Layer w0.254: R1.1 58.683,16.933 58.961,16.655 59.046,16.655 59.445,16.256 v1(61.976,16.256)
NetR5_1: R5.1 U7.1 U7.2 | length 9.2
  Top Layer w0.254: U7.1 U7.2 24.02,15.108 25.22,15.108 27.374,12.954 29.337,12.954 29.845,13.462 R5.1@31.438,13.462
NetR6_1: R6.1 U8.1 U8.2 | length 10
  Top Layer w0.254: U8.1 U8.2 24.71,23.655 25.909,23.655 27.778,21.787 30.271,21.787 30.836,22.352 R6.1@32.962,22.352
NetR9_1: R9.1 U8.6 U8.7 | length 5.3
  Top Layer w0.254: U8.6 U8.7 31.325,23.693 32.835,25.203 R9.1@32.835,25.273
NetR10_1: R10.1 U7.6 U7.7 | length 4
  Top Layer w0.254: U7.6 U7.7 30.005,15.146 30.353,15.494 R10.1@31.438,15.494
NetR14_1: R14.1 U10.1 U10.2 | length 12.5
  Top Layer w0.254: U10.1 U10.2 23.158,5.635 24.577,5.635 24.992,5.221 24.992,3.951 25.754,3.189 28.956,3.189 29.845,4.078 R14.1@32.808,4.078
NetR15_1: R15.1 U9.1 U9.2 | length 10.7
  Top Layer w0.254: U9.1 U9.2 26.992,33.091 27.63,32.453 27.63,31.972 28.416,31.185 33.229,31.185 34.105,32.061 R15.1@34.105,32.131
NetR17_1: R17.1 U9.6 U9.7 | length 5.4
  Top Layer w0.254: U9.6 U9.7 31.746,33.091 32.818,34.163 R17.1@34.105,34.163
NetR18_1: R18.1 U10.6 U10.7 | length 6.4
  Top Layer w0.254: U10.6 U10.7 31.229,5.673 32.485,6.929 R18.1@32.485,6.999
NetR22_2: R22.2 U11.3 | length 4.2
  Top Layer w0.254: U11.3@104.592,26.027 104.592,23.932 105.602,22.922 106.255,22.922 R22.2
NetU1_32: U1.32 U2.3 | length 8.3
  Top Layer w0.254: U1.32 67.397,21.784 U2.3
RS485RX: Teensy1.15 U11.1 | length 33.8
  Top Layer w0.254: U11.1@103.292,26.027 103.359,25.96 103.359,5.756 103.781,5.334 113.665,5.334 Teensy1.15
RS485TX: Teensy1.14 U11.4 | length 22.6
  Top Layer w0.254: U11.4@105.242,26.027 105.242,25.496 105.371,25.207 105.476,25.207 107.27,23.414 107.27,23.294 108.778,21.526 108.839,21.455 108.839,19.812 109.715,18.936 111.082,18.936 113.284,16.734 Teensy1.14
SCLK: Teensy1.13 U1.17 | length 56.4
  Top Layer w0.254: U1.17 67.97,6.223 73.399,6.223 75.431,4.191 82.169,4.191 v1(84.074,6.096)
  Bottom Layer w0.254: v1(84.074,6.096) 109.347,6.096 Teensy1.13
SDI: Teensy1.11 U1.18 | length 93.8
  Top Layer w0.254: U1.18 61.055,14.784 65.298,10.541 v1(65.405,10.541)
  Bottom Layer w0.254: v1(65.405,10.541) 71.266,4.68 124.792,4.68 127.13,7.018 127.13,8.887 Teensy1.11
SDO: Teensy1.12 U1.19 | length 91.1
  Top Layer w0.254: U1.19 62.694,15.284 v1(65.278,12.7)
  Bottom Layer w0.254: v1(65.278,12.7) 72.844,5.134 122.706,5.134 124.59,7.018 124.59,8.887 Teensy1.12
SYNC: U1.36 U1.38 | length 3.9
  Top Layer w0.254: U1.38 55.479,24.738 56.12,25.379 56.33,25.379 56.479,25.23 U1.36
V3ref: C3.1 U1.11 U1.30 U1.35 U1.57 U2.1 U2.4 U5.1 U5.2 U5.3 | length 72.6
  Top Layer w0.254: U1.57 48.562,17.797 49.424,17.797 50.169,18.542 53.34,18.542 54.292,19.494 ; U1.11 55.492,12.367 55.492,13.694 55.641,13.843 56.968,13.843 57.658,14.533 57.658,16.129 54.292,19.494 ; U1.30 72.876,20.784 73.025,20.933 U2.4 73.533,22.84 73.533,25.928 U2.1 73.025,28.067 ; U5.3 U5.2 U5.1 76.2,31.877 76.352,31.725 76.352,31.13 77.177,30.305 77.177,29.337 77.177,28.216 77.028,28.067 73.025,28.067 ; 54.292,19.494 56.966,22.168 56.966,23.701 U1.35 56.992,23.727 56.992,24.988 60.071,28.067 73.025,28.067
V4ref: C4.1 C6.2 C25.2 C26.1 U1.6 U1.43 U6.6 | length 45.4
  Top Layer w0.254: U1.6 52.992,12.367 52.992,13.087 53.012,13.107 53.012,13.249 53.733,13.97 54.864,13.97 v1(56.261,15.367) ; U1.43 52.992,23.701 52.992,22.7 v1(54.229,21.463) ; 53.975,27.178 55.499,28.702 65.129,28.702 65.278,28.851 65.278,30.037 C25.2 65.291,30.174 65.291,32.258 65.291,32.288 64.051,33.528 U6.6
  Bottom Layer w0.254: v1(53.721,26.524) 53.721,24.655 56.336,22.04 56.336,21.648 56.502,21.814 56.502,19.887 C6.2 56.323,19.558 55.753,19.558 ; v1(54.229,21.463) 54.282,21.463 55.753,19.992 55.753,19.558 ; v1(56.261,15.367) 56.261,15.642 55.753,16.15 55.753,19.558
VCM: P3.1 U1.59 | length 5.7
  Top Layer w0.254: P3.1 45.205,17.526 45.947,16.784 U1.59
pads on no net: Teensy1.0 Teensy1.1 Teensy1.3.3V_2 Teensy1.7 Teensy1.8 Teensy1.16 Teensy1.17 Teensy1.19 Teensy1.20 Teensy1.21 Teensy1.22 Teensy1.23 Teensy1.G1 Teensy1.ON-OFF Teensy1.PGM Teensy1.VBAT U1.12 U1.13 U1.14 U1.15 U1.20 U1.22 U1.23 U1.37 U3.1 U3.3 U3.5 U3.7 U3.8 U4.3 U4.6 U5.6 U6.1 U6.3 U6.5 U6.7 U6.8
copper on no net:
  other v1: 57.15,9.779

## Polygon pours and split planes (outlines as drawn)
GND on GND (split plane): 164.617,38.789 164.617,1.211 163.916,0.51 1.338,0.51 0.637,1.211 0.637,38.789 1.338,39.49 163.916,39.49
5V on 5V (split plane): 164.617,38.789 164.617,1.211 163.916,0.51 1.338,0.51 0.637,1.211 0.637,38.789 1.338,39.49 163.916,39.49

## Silkscreen, mask and mechanical layers (free items; w line width, h text height)
Top Overlay:
  drawing of 5 lines, arcs and shapes, not listed
  text "B" at 154.813,30.988 h1.52
  text "A" at 84.074,16.256 h1.52
  text "B" at 99.695,15.494 h1.52
  text "A" at 154.813,5.842 h1.52
Mechanical 1:
  the board outline again, w0.254

## Text inside footprints (layer, text, board x,y; h text height)
Teensy1: Top Overlay "GND" at 143.51,27.178 h0.81 r270; Mechanical 13 "GND" at 143.51,27.178 h0.81 r270
U5: Mechanical 13 "*" at 74.917,32.677 h1.27 r180